# Altium PCB NyaBall.PcbDoc
Units mil, origin at the board's own origin, x right, y up, seen from the top; angles counter-clockwise.
Board outline 984.22 x 984.22 mil, 4 copper layers (Top Layer, Mid 1, Mid 2, Bottom Layer), stack 63.233 mil thick; 58 components, 37 nets, 194 pads, 74 vias.
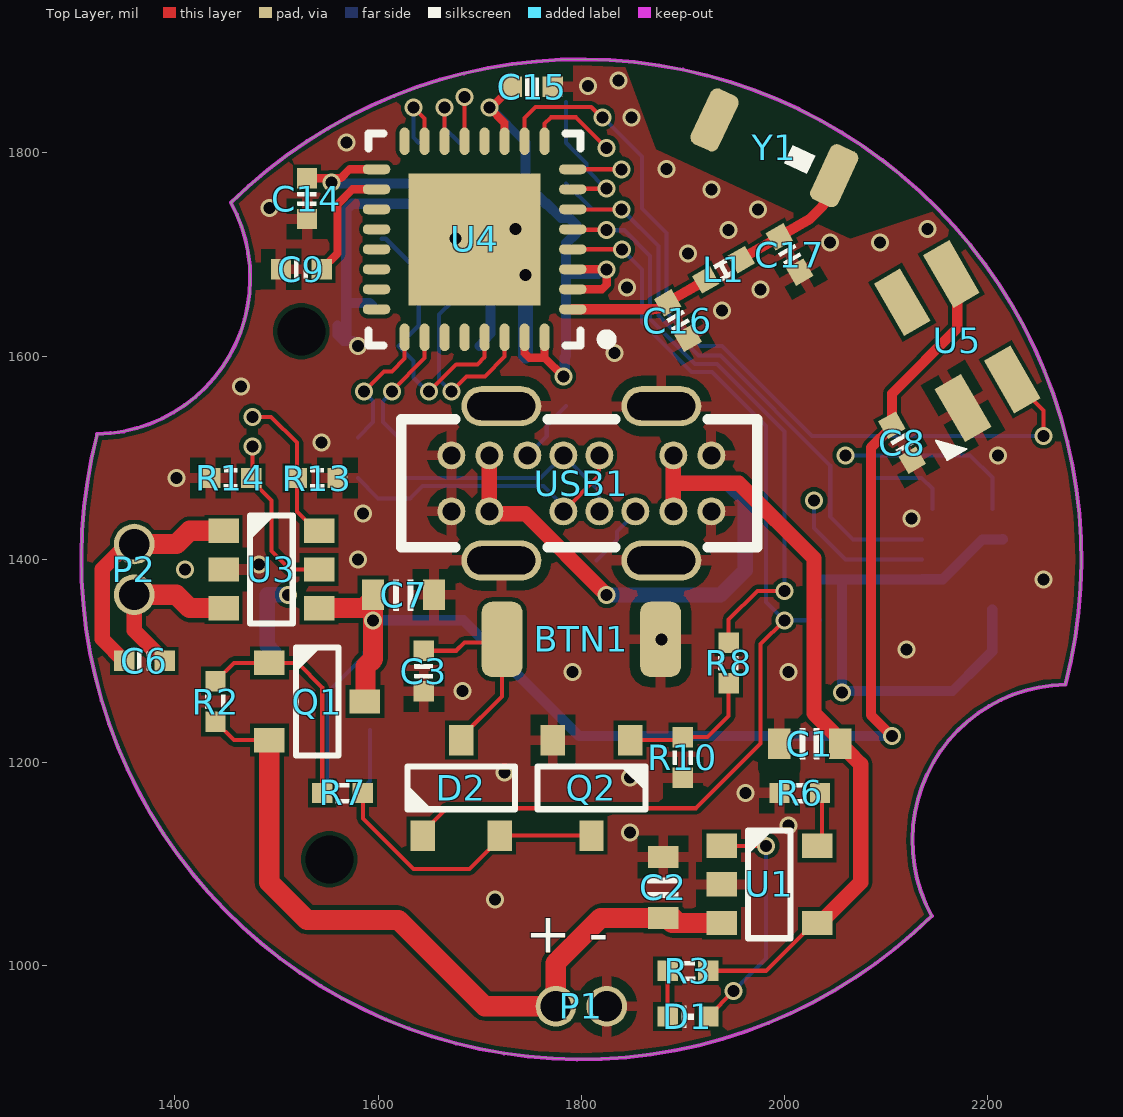
[diagram p0: Top Layer view]
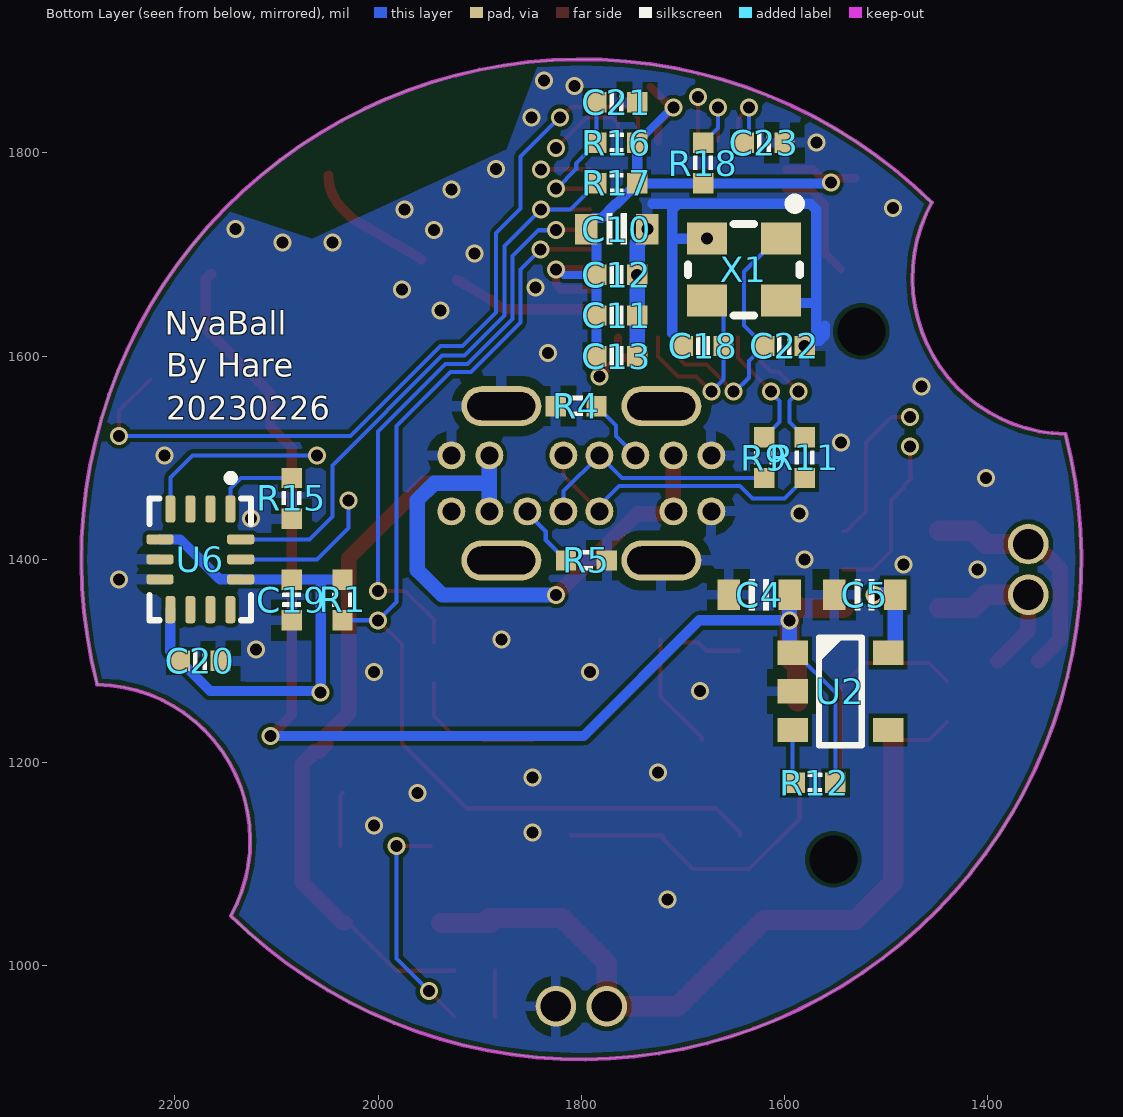
[diagram p1: Bottom Layer view, seen from below]
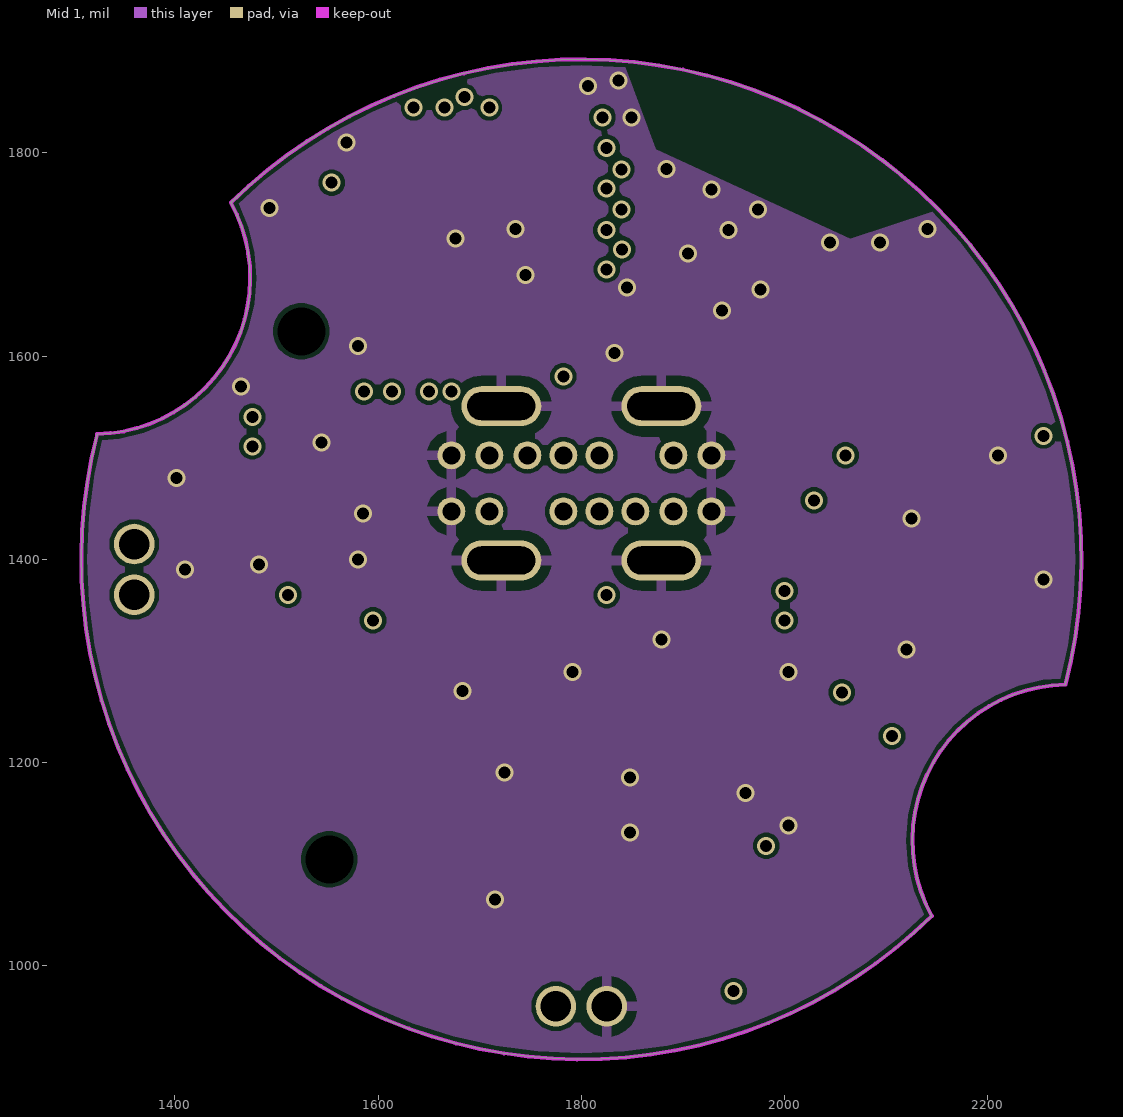
[diagram p2: Mid 1]
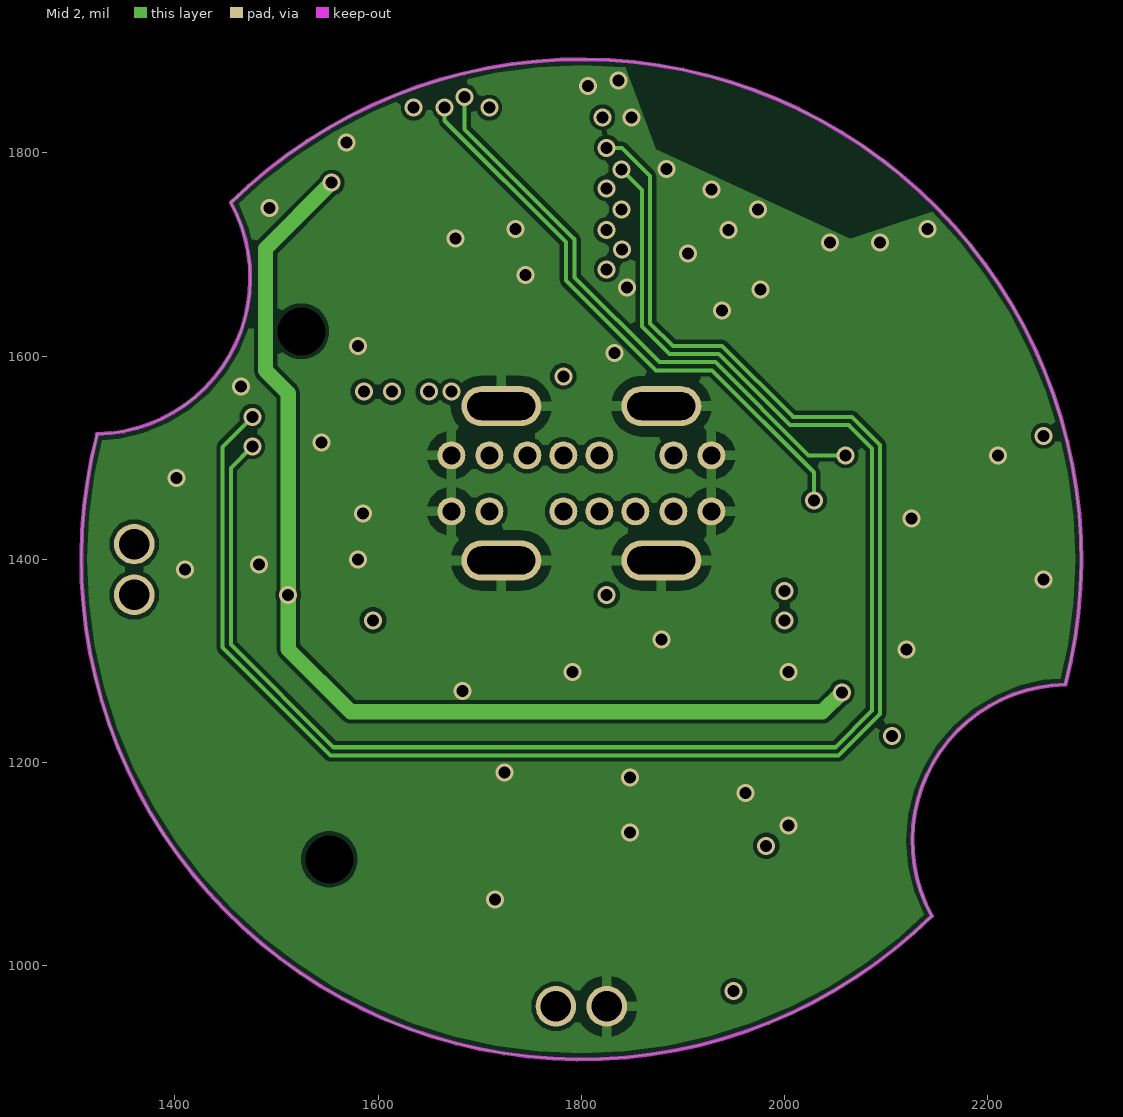
[diagram p3: Mid 2]
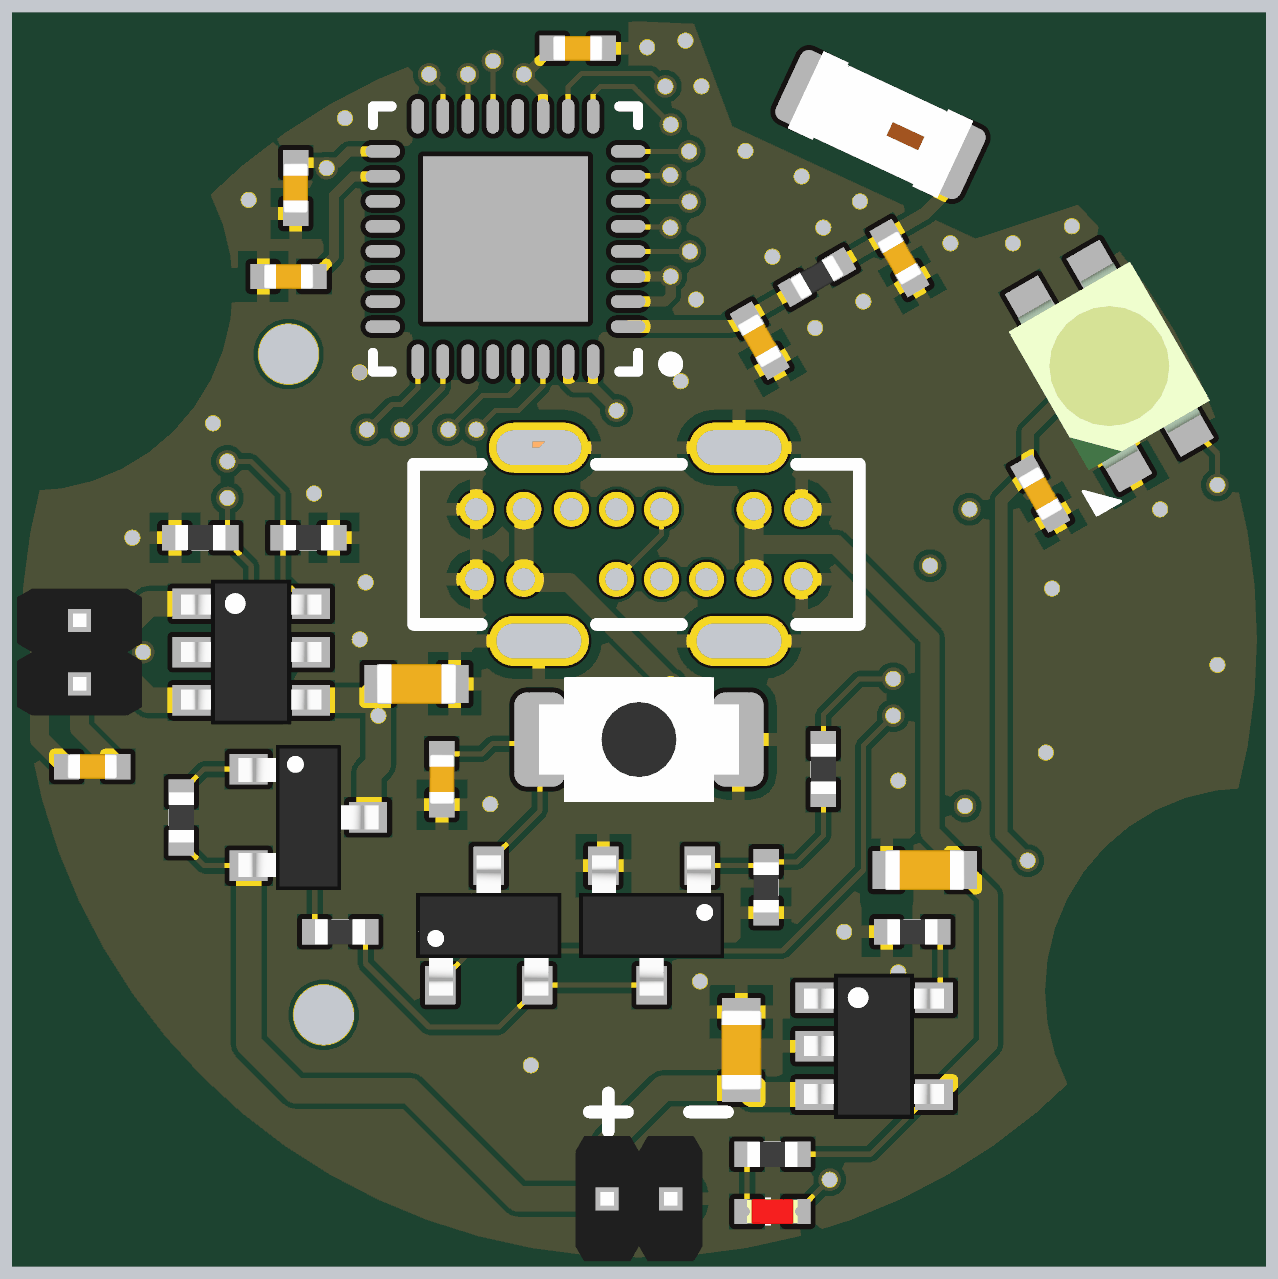
[diagram p4: 3D render of the assembled board from above, using the file's embedded part models]
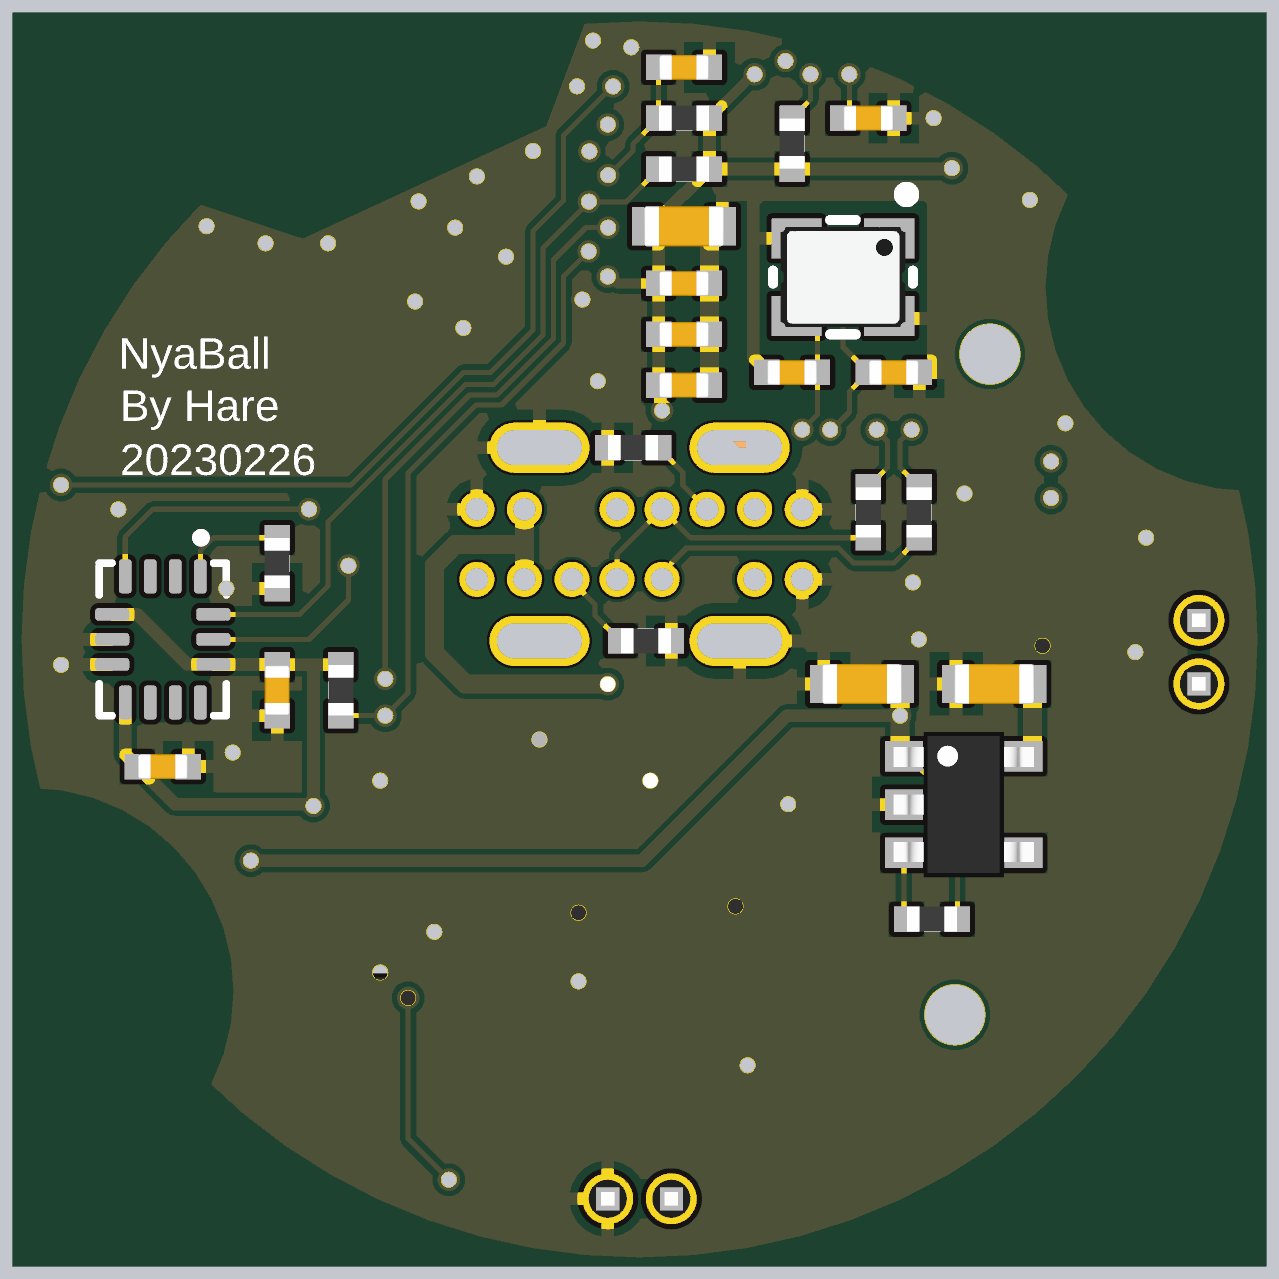
[diagram p5: 3D render of the assembled board from below, using the file's embedded part models]

## Layer stack, top to bottom
Top Solder: solder mask 0.4, Solder Resist, Dk 3.8
Top Layer: signal copper 1.4
Dielectric 2: prepreg 3.937, PP-006, Dk 4.05
Mid 1: signal copper 1.3779
Dielectric 1: prepreg 49.8031, PP-006, Dk 4.6
Mid 2: signal copper 1.3779
Dielectric 3: prepreg 3.937, PP-006, Dk 4.05
Bottom Layer: signal copper 1.4
Bottom Solder: solder mask 0.4, Solder Resist, Dk 3.8

## Board outline
1323.56,1523.26 ccw(c1800,1400) 2144.96,1049.02 cw(c2279.38,1123.23) 2276.44,1276.74 ccw(c1800,1400) 1455.04,1750.98 cw(c1320.62,1676.77)

## Design rules (kind name [scope] priority, off if disabled: settings)
Clearance [All] p1: gap=4 ignorepadtopadclearanceinfootprint=TRUE
ComponentClearance [All] p1: gap=0 collisioncheckmode=3 verticalgap=0 showdistances=FALSE
DiffPairsRouting [All] p1: maxlimit=10 minlimit=10 mostfreqgap=10 toplayer_minwidth=7.87 toplayer_maxwidth=15 toplayer_prefwidth=7.87 midlayer1_minwidth=7.87 midlayer1_maxwidth=15 midlayer1_prefwidth=7.87 midlayer2_minwidth=7.87 midlayer2_maxwidth=15 midlayer2_prefwidth=7.87 bottomlayer_minwidth=7.87 bottomlayer_maxwidth=15 bottomlayer_prefwidth=7.87 maxuncoupledlength=500
Height [All] p1 off: minheight=0 maxheight=0 prefheight=0
MatchedLengths SD_CARD_MatchedLengths [InNetClass('SD_CARD')] p1: tolerance=400 checknetsindiffpair=FALSE checkdiffpairvsdiffpair=TRUE checkxsignals=TRUE checkothers=TRUE
PolygonConnect PolygonConnect_Via [IsVia] p1: connectstyle=Direct reliefconductorwidth=10 reliefentries=4 polygonreliefangle="90 Angle" airgapwidth=10
PolygonConnect PolygonConnect_GND [InNet('GND')] p2: connectstyle=Relief reliefconductorwidth=10 reliefentries=4 polygonreliefangle="90 Angle" airgapwidth=10
PolygonConnect [All] p3: connectstyle=Direct reliefconductorwidth=10 reliefentries=4 polygonreliefangle="90 Angle" airgapwidth=10
RoutingVias [All] p1: holewidth=28 width=50 viastyle="Through Hole" minholewidth=7.87 minwidth=15.75 maxholewidth=28 maxwidth=50
SolderMaskExpansion [All] p1: expansion=4 istentingtop=FALSE
Width Width_PWR [InNetClass('PWR')] p1: maxlimit=23.62 minlimit=7.87 preferedwidth=10
Width [All] p2: maxlimit=78.74 minlimit=4 preferedwidth=10
27 further rules are at their usual default settings.

## Components (designator, comment, footprint, x,y, rotation, side; value= is the part's Value field where it differs from the comment)
BTN1 "PWR Button" BTN_2S 1800,1321.26 r180 top locked
C1 "10uF" CAP_0603 2024.81,1218.5 r0 top
C2 "10uF" CAP_0603 1880.5,1077 r270 top
C3 "100nF" CAP_0402 1645,1290 r270 top
C4 "10uF" CAP_0603 1625,1365 r180 bottom
C5 "10uF" CAP_0603 1521,1365 r180 bottom
C6 "100nF" CAP_0402 1370,1300 r0 top
C7 "10uF" CAP_0603 1625,1365 r180 top
C8 "1uF" CAP_0402 2115.75,1514.75 r120 top
C9 "1uF" CAP_0402 1524.41,1685.47 r0 top
C10 "10uF" CAP_0603 1765,1725 r0 bottom
C11 "1uF" CAP_0402 1765,1640 r0 bottom
C12 "1uF" CAP_0402 1765,1680 r0 bottom
C13 "100nF" CAP_0402 1765,1600 r0 bottom
C14 "100nF" CAP_0402 1530,1755 r90 top
C15 "100nF" CAP_0402 1751.85,1865 r180 top
C16 "NC" CAP_0402 1895,1635 r120 top
C17 "NC" CAP_0402 2005,1700 r120 top
C18 "18pF" CAP_0402 1680,1610 r180 bottom
C19 "100nF" CAP_0402 2085,1360 r90 bottom
C20 "100nF" CAP_0402 2175,1300 r0 bottom
C21 "1uF" CAP_0402 1765,1850 r0 bottom
C22 "18pF" CAP_0402 1600,1610 r0 bottom
C23 "NC" CAP_0402 1620,1810 r180 bottom
D1 "RED" LED_0402 1905,950 r180 top
D2 "BAT54" SOT-23-3 1681.85,1175 r270 top
L1 "0R" IND_0402 1940,1685 r30 top
P1 "DIP 1x2" HDR1X2_1.27_180 1775,960 r90 top
P2 "DIP 1x2" HDR1X2_1.27_180 1360,1365 r180 top
Q1 "SI2305" SOT-23-3 1540,1260 r180 top
Q2 "SS8050" SOT-23-3 1810,1175 r90 top
R1 "10K" RES_0402 2035,1360 r90 bottom
R2 "100K" RES_0402 1440,1260 r270 top
R3 "4.7K" RES_0402 1905,995 r0 top
R4 "5.1K" RES_0402 1805,1550.78 r180 bottom
R5 "5.1K" RES_0402 1795,1398.83 r0 bottom
R6 "18K" RES_0402 2015,1170 r180 top
R7 "100K" RES_0402 1565,1170 r180 top
R8 "1K" RES_0402 1945,1298 r270 top
R9 "22R" RES_0402 1620,1500 r90 bottom
R10 "10K" RES_0402 1900,1205 r90 top
R11 "22R" RES_0402 1580,1500 r90 bottom
R12 "10K" RES_0402 1570,1180 r0 bottom
R13 "10K" RES_0402 1540,1480 r0 top
R14 "10K" RES_0402 1455,1480 r180 top
R15 "10K" RES_0402 2085,1460 r270 bottom
R16 "10K" RES_0402 1765,1810 r0 bottom
R17 "4.7K" RES_0402 1765,1770 r180 bottom
R18 "4.7K" RES_0402 1680,1790 r270 bottom
U1 "TP4065" SOT-23-5 1985,1080 r180 top
U2 "RT9193-33GB" SOT-23-5 1545,1270 r0 bottom
U3 "MX113H" SOT-23-6 1495,1390 r180 top
U4 "ESP32-C3FN4" QFN-32-5x5-P0.5 1695,1715 r90 top locked
U5 "TC3528RGB" LED_3528_RGB 2170,1615 r120 top locked
U6 "BMI160" LGA-14-2.5X3.0-P0.5 2175,1400 r0 bottom
USB1 "Type-C" USB-C-TH_TYPE-C-USB-14P 1800,1474.8 r180 top locked
X1 "X252040MMB4SI" XTAL_2520-4 1640,1685 r0 bottom
Y1 "2450AT18B100" ANT_2.4G_3.2x1.6 1990,1805 r155 top

## Footprints (in the part's own frame and the unit in brackets; to place one, negate y for a bottom-side part, rotate by r counter-clockwise, add the part's x,y. Pads: shape width x height; smd on the part's side, far side on the other; paste and mask are expansions set on the pad)
ANT_2.4G_3.2x1.6 [mil]
  rrect50% 30x60 smd: 1(-65,0) 2(65,0)
  silkscreen extent -40,-10 -15,10, body extent -65,-33 65,33, height 53
BTN_2S [mil]
  rrect50% 40x74 smd: 1(-78,0) 2(78,0)
  body extent -79,-49 79,49, height 63
CAP_0402 [mil]
  rect 20x20 smd: 1(-20,0) 2(20,0)
  silkscreen extent -7,-9 7,9, body extent -20,-10 20,10, height 20
CAP_0603 [mil]
  rect 22x30 smd: 1(-30,0) 2(30,0)
  silkscreen extent -10,-15 10,15, body extent -31,-16 31,16, height 31
HDR1X2_1.27_180 [mil]
  round 40 hole 30: 1(0,0) 2(0,-50)
  body extent -49,-75 49,25, height 210
IND_0402 [mil]
  rect 20x20 smd: 1(-20,0) 2(20,0)
  silkscreen extent -7,-9 7,9, body extent -20,-10 20,10, height 20
LED_0402 [mil]
  rect 20x20 smd: 1(20,0) 2(-20,0)
  silkscreen extent -6,-10 6,10, body extent -20,-10 20,10, height 18
LED_3528_RGB [mil]
  rect 60x30 smd: 1(-60,28) 2(-60,-28) 3(60,-28) 4(60,28)
  silkscreen extent -97,45 -75,67, body extent -69,-55 69,55, height 75
LGA-14-2.5X3.0-P0.5 [mil]
  rrect50% 9.84x26.78 smd: 1(-29.53,-49.61) 3(9.84,-49.61) 9(9.84,49.61) 11(-29.53,49.61)
  rrect50% 9.85x26.78 smd: 2(-9.84,-49.61) 4(29.53,-49.61) 8(29.53,49.61) 10(-9.84,49.61)
  rrect50% 26.78x9.84 smd: 5(39.76,-19.68) 6(39.76,0) 13(-39.76,0) 14(-39.76,-19.68)
  rrect50% 26.78x9.85 smd: 7(39.76,19.69) 12(-39.76,19.69)
  silkscreen extent -50,-82 50,60, body extent -49,-59 49,59, height 33
QFN-32-5x5-P0.5 [mm] "QFN, 32-Leads, Body 4.95x4.95mm, Pitch 0.50mm, Thermal Pad 3.30x3.30mm, IPC Medium Density"
  oval 0.25x0.69 smd: 1(-1.75,-2.452) 2(-1.25,-2.452) 3(-0.75,-2.452) 4(-0.25,-2.452) 5(0.25,-2.452) 6(0.75,-2.452) 7(1.25,-2.452) 8(1.75,-2.452) 17(1.75,2.452) 18(1.25,2.452) 19(0.75,2.452) 20(0.25,2.452) 21(-0.25,2.452) 22(-0.75,2.452) 23(-1.25,2.452) 24(-1.75,2.452)
  oval 0.69x0.25 smd: 9(2.452,-1.75) 10(2.452,-1.25) 11(2.452,-0.75) 12(2.452,-0.25) 13(2.452,0.25) 14(2.452,0.75) 15(2.452,1.25) 16(2.452,1.75) 25(-2.452,1.75) 26(-2.452,1.25) 27(-2.452,0.75) 28(-2.452,0.25) 29(-2.452,-0.25) 30(-2.452,-0.75) 31(-2.452,-1.25) 32(-2.452,-1.75)
  rect 3.3x3.3 smd: 33(0,0)
  silkscreen extent -2.65,-3.43 2.65,2.65, body extent -2.5,-2.5 2.5,2.5, height 0.85
RES_0402 [mil]
  rect 20x20 smd: 1(-20,0) 2(20,0)
  silkscreen extent -7,-10 7,10, body extent -20,-10 20,10, height 14
SOT-23-3 [mil]
  rect 30x24 smd: 1(47,-38) 2(47,38) 3(-47,0)
  silkscreen extent -21,-53 21,53, body extent -55,-57 55,57, height 51
SOT-23-5 [mil]
  rect 30x24 smd: 1(47,-38) 2(47,0) 3(47,38) 4(-47,38) 5(-47,-38)
  silkscreen extent -21,-53 21,53, body extent -55,-57 55,57, height 57
SOT-23-6 [mil]
  rect 30x24 smd: 1(47,-38) 2(47,0) 3(47,38) 4(-47,38) 5(-47,0) 6(-47,-38)
  silkscreen extent -21,-53 21,53, body extent -55,-57 55,57, height 57
USB-C-TH_TYPE-C-USB-14P [mm]
  oval 2x1 hole 0.7 slot 1.7 at 0 deg mask+0.051: 0(-2,1.93) 0(-2,-1.93) 0(2,1.93) 0(2,-1.93)
  round 0.7 hole 0.45 mask+0.051: 1(-3.25,-0.7) 2(-2.3,-0.7) 3(-0.45,-0.7) 4(0.45,-0.7) 5(1.35,-0.7) 6(2.3,-0.7) 7(3.25,-0.7) 8(3.25,0.7) 9(2.3,0.7) 10(0.45,0.7) 11(-0.45,0.7) 12(-1.35,0.7) 13(-2.3,0.7) 14(-3.25,0.7)
  silkscreen extent -4.4,-1.6 4.5,1.6
XTAL_2520-4 [mm]
  rect 1x0.8 smd: 1(-0.925,-0.775) 2(0.925,-0.775) 3(0.925,0.775) 4(-0.925,0.775)
  silkscreen extent -1.4,-1.78 1.4,1.14, body extent -1.25,-1 1.25,1, height 0.79

## Part data
BTN1: library part Button, "Button"
C1 C2 C3 C4 C5 C6 C7 C8 C9 C10 C11 C12 C13 C14 C15 C16 C17 C18 C19 C20 C21 C22 C23: library part CAP, "Capacitor"
  C1 C2 C4 C5 C7 C8 C9 C10 C11 C12 C21: Specification="X5R 10V"
  C3 C6 C13 C14 C15 C16 C17 C19 C20 C23: Specification="X7R 50V"
  C18 C22: Specification="COG 50V"
D1: library part LED, "LED"
D2: library part Diode-2
L1: library part IND, "Inductor", Specification=2.2A
P1 P2: library part HDR1x2, "Header", Type=1.27
Q1: library part MOS-P, "P-Channel MOSFET", Specification="-12V -2.8A"
Q2: library part BJT_NPN, "Transistor", Specification="40V 1.5A"
R1 R2 R3 R4 R5 R6 R7 R8 R9 R10 R11 R12 R13 R14 R15 R16 R17 R18: library part RES, "Resistor", Specification=±1%
U1: "TP4065线性锂离子电池充电器"
U2: library part RT9193, "LDO"
U3: "电机驱动 VCC=6.5V 条件下最大持续输出电流达到 1A，最大峰值输出电流达到 1.5A；工作电压2V 到 8V"
U4: library part ESP32-C3
U6: "low power IMU"
USB1: library part USB-Type-C-14P
X1: library part XTAL-4P, Specification=40M-10pF
Y1: library part ANTENNA

## Free pads (board coordinates)
  round 0 hole 47.24: 0(1524.41,1624.41) 0(1551.97,1104.72)

## Via types
v1: diameter 17.72, hole 11.81, Top Layer to Bottom Layer, tented both sides, 74 vias

## Nets (pads, with @x,y where several pads share a name; then routed paths per layer and width w, separated by ;. In a path a pad name is that pad's centre, name@x,y a point inside that pad or via, vN(x,y) a via of type N, cw(c..) or ccw(c..) an arc to the next point about the centre after c; other vN are vias at no path point)
ESP_IO2: R17.1 U4.6 U6.14 | length 613.4
  Top Layer w4: U4.6 1791.71,1744.33 v1(1839.81,1744.33)
  Bottom Layer w4: R17.1 1810.86,1744.14 1839.61,1744.14 v1(1839.81,1744.33) 1875.8,1708.35 1875.8,1639.79 1915.18,1600.41 1936.9,1600.41 2045,1492.31 2045,1442.2 2067.52,1419.68 U6.14
ESP_IO8: R18.1 U4.14 U6.13 | length 789
  Top Layer w4: U4.14 v1(1665.47,1844.51)
  Mid 2 w4: v1(1665.47,1844.51) 1665.47,1831.64 1785,1712.11 1785,1674.47 1873.47,1586 1928.68,1586 2029,1485.68 v1(2029,1458)
  Bottom Layer w4: v1(1665.47,1844.51) 1665.47,1824.53 R18.1 ; v1(2029,1458) 2029,1431 2060,1400 U6.13
ESP_IO9: C23.1 U4.15 | length 74
  Top Layer w4: v1(1635,1844.51) 1645.79,1833.72 U4.15
  Bottom Layer w4: v1(1635,1844.51) 1635,1815 C23.1
ESP_RST: C21.2 R16.2 U4.7 | length 135.2
  Top Layer w4: U4.7 1792,1764.69 1824.21,1764.69 v1(1824.69,1765.16)
  Bottom Layer w4: C21.2 R16.2 1793,1802 1793,1801.75 1805,1789.75 1805,1784.21 1824.05,1765.16 v1(1824.69,1765.16)
ESP_USB_D_N: R11.2 U4.25 | length 129.5
  Top Layer w4: v1(1586,1565) 1605.8,1584.8 1613.48,1584.8 1626.1,1597.43 U4.25
  Bottom Layer w4: R11.2 1595,1535 1595,1556 v1(1586,1565)
ESP_USB_D_P: R9.2 U4.26 | length 121.6
  Top Layer w4: v1(1613.48,1565) 1613.48,1565.74 1645.79,1598.05 U4.26
  Bottom Layer w4: v1(1613.48,1565) 1613.48,1564.28 1605,1555.8 1605,1535 R9.2
ESP_XTAL_IN: C18.2 U4.30 X1.3 | length 188.6
  Top Layer w4: v1(1672.05,1565) 1687.04,1580 1705,1580 1724.53,1599.53 U4.30
  Bottom Layer w4: v1(1672.05,1565) 1660,1577.05 1660,1640.74 1673.75,1654.49 X1.3
ESP_XTAL_OUT: C22.2 U4.29 X1.1 | length 277.8
  Top Layer w4: v1(1650,1565) 1676.9,1591.9 1697.84,1591.9 1704.84,1598.9 U4.29
  Bottom Layer w4: X1.1 1607.52,1715.51 1640,1683.03 1640,1630 C22.2 1635,1595 1635,1578.7 1648.7,1565 v1(1650,1565)
GND: BTN1.1 C1.1 C2.1 C3.2 C4.1 C5.1 C7.1 C8.1 C9.1 C10.1 C11.1 C12.1 C13.1 C14.1 C15.1 C16.1 C17.1 C18.1 C19.1 C20.1 C21.1 C22.1 C23.2 P1.2 Q2.2 R4.1 R5.1 R6.2 R10.1 R13.2 R14.2 R15.2 U1.2 U2.2 U3.2 U4.33 U5.1 U6.6 U6.7 USB1.0 USB1.1 USB1.7 USB1.8 USB1.14 X1.2 X1.4 | length 658.9
  Bottom Layer w10: 1560,1630 1560,1620.86 1565.86,1615 1575.36,1615 v1(1580.36,1610) ; 1568.69,1621.31 1568.69,1652.42 ; X1.4@1595.13,1648.53 1591.24,1652.42 1568.69,1652.42 ; v1(1676.42,1715.51) 1709.98,1715.51 1710.49,1715 ; C18.1 1705,1615 1705,1616.73 1710.49,1622.22 1710.49,1715 ; 1730,1750 1704.63,1750 ; 1568.69,1652.42 1568.69,1744.14 1574.55,1750 1704.63,1750 ; 1704.63,1750 1710.49,1744.14 1710.49,1715
  Bottom Layer w15: v1(1735,1725) 1735,1721 1745,1711 C12.1 ; C13.1 C11.1 1745,1679.69 v1(1745.31,1680)
  other v1: 1715,1065 1848,1131 2003.96,1138 1961.43,1170 1848,1185 1724.53,1190 1683.05,1270.36 1791.52,1288.89 2003.96,1288.89 2120,1311 1878.74,1321.26 2255,1380 1410,1390 1483,1395 1580.36,1400 2125,1440 1585,1444.84 1401.5,1480 2210,1502.27 1544.41,1514.75 1465,1570 1832.86,1603.07 1938.62,1645 1976.5,1665.79 1844.94,1667.33 1905,1701.06 2045,1711.59 2094.18,1711.59 1945,1723.89 2140.57,1725 1973.81,1744.53 1493,1745.74 1927.95,1764.21 1883.8,1784.21 1568.69,1810 1849.16,1835.08 1806.5,1865.75 1836.58,1871.02
IMU_INT: U4.13 U6.4 | length 789.5
  Top Layer w4: U4.13 v1(1685.16,1855)
  Mid 2 w4: v1(1685.16,1855) 1685.16,1823.27 1793.43,1715 1793.43,1677.36 1876.79,1594 1932,1594 2023.63,1502.36 v1(2060,1502.36)
  Bottom Layer w4: v1(2060,1502.36) 2182.64,1502.36 2204.53,1480.47 U6.4
KEY_WKUP: D2.2 Q2.3 R7.1 | length 286.1
  Top Layer w4: R7.1 1585,1145 1635,1095 1689.84,1095 1709.84,1115 1719.85,1125 D2.2 Q2.3
MOTOR_IN1: R14.1 U3.5 U4.8 | length 1803.5
  Top Layer w4: v1(1476.27,1511.27) 1476.27,1481.27 R14.1 1483,1472 1483,1470 1495,1458 1495,1408.24 1513.24,1390 U3.5 ; U4.8 v1(1839.45,1783.9)
  Mid 2 w4: v1(1476.27,1511.27) 1455,1490 1455,1316.31 1556.31,1215 2050,1215 2086.18,1251.18 2086.18,1509.03 2063.2,1532 2005.31,1532 1935.31,1602 1886.76,1602 1859.8,1628.97 1859.8,1763.56 v1(1839.45,1783.9)
MOTOR_IN2: R13.1 U3.6 U4.9 | length 1932.2
  Top Layer w4: v1(1476.27,1540) 1494.75,1540 1520,1514.75 R13.1 1520,1447 1529,1438 1539,1428 U3.6 ; U4.9 1763.9,1828.9 1770.08,1835.08 1794.92,1835.08 v1(1825,1805)
  Mid 2 w4: v1(1476.27,1540) 1464.54,1528.28 1447,1510.73 1447,1313 1553,1207 2053.31,1207 2094.18,1247.86 2094.18,1512.34 2066.52,1540 2008.62,1540 1938.62,1610 1890.07,1610 1867.8,1632.28 1867.8,1777.15 1839.95,1805 v1(1825,1805)
NetBTN1_2: BTN1.2 C3.1 D2.3 | length 202.6
  Top Layer w4: C3.1 1676.9,1310 1684.9,1318 1706.5,1318 BTN1.2@1722,1302.5 ; D2.3 1681.85,1225 1722,1265.15 BTN1.2@1722,1302.5 ; BTN1.2 BTN1.2@1722,1302.5
NetC6_1: C6.1 P2.2 U3.1 | length 234.3
  Top Layer w15: C6.1 1328.5,1321.5 1328.5,1390.26 1353.24,1415 P2.2
  Top Layer w20: P2.2 1401.5,1415 1414.5,1428 U3.1
NetC6_2: C6.2 P2.1 U3.3 | length 165.8
  Top Layer w15: P2.1 1360,1330 1387.5,1302.5 C6.2
  Top Layer w20: P2.1@1365,1365 1401.5,1365 1414.5,1352 U3.3
NetC9_2: C9.2 U4.18 | length 114.9
  Top Layer w8: C9.2 1560,1701.06 1560,1749.29 1574.92,1764.21 U4.18
NetC16_2: C16.2 L1.1 U4.1 | length 139.2
  Top Layer w10: U4.1 1869.99,1646.1 ccw(c1869.99,1667.33) C16.2 1888.98,1655.44 1918.39,1672.42 L1.1
NetC17_2: C17.2 L1.2 Y1.1 | length 129.1
  Top Layer w10: L1.2 1961.43,1697.88 1990.7,1714.77 C17.2 1999.17,1720.09 2025,1735 2035.74,1745.74 ccw(c2003.96,1777.53) Y1.1
NetD1_1: D1.1 R3.1 | length 45
  Top Layer w4: D1.1 R3.1
NetD1_2: D1.2 U1.1 | length 225.6
  Top Layer w4: D1.2 v1(1950,975) ; U1.1@1948,1118 v1(1982,1118)
  Bottom Layer w4: v1(1950,975) 1982,1007 v1(1982,1118)
NetQ1_1: Q1.1 R2.1 R7.2 | length 226.4
  Top Layer w4: R2.1 1458,1298 Q1.1 1521,1298 1545,1274 R7.2
NetQ2_1: Q2.1 R8.2 R10.2 | length 139.1
  Top Layer w4: Q2.1 1897,1222 R10.2 1924.34,1225 1945,1245.66 R8.2
NetR4_2: R4.2 USB1.5 | length 64.2
  Bottom Layer w4: USB1.5 1766,1521.52 1766,1531.78 R4.2
NetR5_2: R5.2 USB1.12 | length 64.2
  Bottom Layer w4: R5.2 1835,1418.83 1835,1427.42 1853.15,1445.56 USB1.12
NetR6_1: R6.1 U1.5 | length 52.8
  Top Layer w4: R6.1 2037,1168 U1.5@2037,1118
NetR12_2: R12.2 U2.3 | length 52.8
  Bottom Layer w4: R12.2 1592,1182 U2.3
NetR15_1: R15.1 U6.1 | length 84.7
  Bottom Layer w4: R15.1 2135,1480 2145.47,1469.53 U6.1
PWR_BTN: D2.1 R1.1 U4.4 | length 1029.8
  Top Layer w4: D2.1 1643.85,1131 1667.85,1155 1913,1155 1976.5,1218.5 1976.5,1316.5 v1(2000,1340) ; U4.4 v1(1840,1705.16)
  Bottom Layer w4: v1(1840,1705.16) 1859.8,1685.36 1859.8,1633.16 1908.55,1584.41 1928.59,1584.41 1982,1531 1982,1358 v1(2000,1340) R1.1
PWR_KEEP: R8.1 U4.5 | length 573.5
  Top Layer w4: U4.5 1792,1724.37 1824.21,1724.37 v1(1824.69,1723.89) ; R8.1 1945,1340.67 1973.33,1369 v1(2000,1369)
  Bottom Layer w4: v1(1824.69,1723.89) 1842.28,1723.89 1867.8,1698.37 1867.8,1636.48 1911.86,1592.41 1933.59,1592.41 2000,1526 v1(2000,1369)
RGB_DIN: U4.10 U5.2 | length 816.1
  Top Layer w4: U4.10 1744.21,1834.29 1754.92,1845 1809.8,1845 1819.82,1834.98 v1(1820.79,1834.98) ; U5.2 2255,1546.29 v1(2255,1521.52)
  Bottom Layer w4: v1(1820.79,1834.98) 1821.38,1834.98 1859.8,1796.56 1859.8,1745.2 1883.8,1721.2 1883.8,1643.1 1916.9,1610 1938.62,1610 2027.11,1521.52 v1(2255,1521.52)
USB_D_N: R11.1 USB1.3 USB1.10 | length 283
  Top Layer w4: USB1.10 1817.63,1482.58 1817.63,1502.27 USB1.3
  Bottom Layer w4: R11.1 1600,1460 1631.62,1460 1643.62,1472 1763,1472 1775,1460
USB_D_P: R9.1 USB1.4 USB1.11 | length 241.3
  Bottom Layer w4: R9.1 1759.92,1480 USB1.4 1817.63,1467.02 1817.63,1447.33 USB1.11
VBAT_IN: C2.2 P1.1 Q1.2 R2.2 U1.3 | length 769.1
  Top Layer w4: R2.2 1458,1222 Q1.2
  Top Layer w20: Q1.2 1493,1082 1530,1045 1620,1045 1705,960 P1.1 1775,1002.72 1819.28,1047 C2.2@1890.5,1047 ; C2.2 1884.5,1047 1889.5,1042 U1.3
VBAT_OUT: C4.2 C7.2 C8.2 Q1.3 R12.1 U2.1 U3.4 U5.3 | length 1432.6
  Top Layer w10: v1(2105.75,1226) 2085,1246.75 2085,1509.81 2105.75,1530.56 C8.2 2105.75,1563.08 2170,1627.33 2170,1675.21 U5.3
  Top Layer w20: U3.4 1586,1352 C7.2@1595,1361 ; Q1.3 1587.63,1260.63 1587.63,1294.5 1595,1301.87 v1(1595,1340) C7.2@1595,1361 ; C7.2 C7.2@1595,1361
  Bottom Layer w4: R12.1 1550,1269 1589,1308 U2.1
  Bottom Layer w10: U2.1@1595,1308 U2.1@1595,1311 ; v1(1595,1340) 1683.89,1340 1797.89,1226 v1(2105.75,1226)
  Bottom Layer w15: U2.1 1595,1311 v1(1595,1340) C4.2
VBUS_5V: C1.2 R3.2 U1.4 USB1.2 USB1.6 USB1.9 USB1.13 | length 1307.1
  Top Layer w4: R3.2 1982,995 2029,1042 U1.4
  Top Layer w15: USB1.6 USB1.9 1711.85,1444.84 1744.96,1444.84 v1(1825,1364.8) ; USB1.13 1890.56,1474.8 ; USB1.2 1890.56,1474.8 ; U1.4 2035,1042 2075,1082 2075,1198.31 2062.31,1211 2058.31,1211 2051.31,1218 2051.31,1226 2029,1248.31 2029,1401 1955.2,1474.8 1890.56,1474.8
  Bottom Layer w15: v1(1825,1364.8) 1936.9,1364.8 1961.43,1389.34 1961.43,1458.24 1944.87,1474.8 1890.56,1474.8 ; USB1.2 1890.56,1474.8 ; USB1.13@1892.96,1449.65 USB1.13 1890.56,1474.8
VCC_3V3: C5.2 C10.2 C11.2 C12.2 C13.2 C14.2 C15.2 C19.2 C20.2 R1.2 R16.1 R17.2 R18.2 U2.5 U4.2 U4.3 U4.11 U4.17 U4.31 U4.32 U6.5 U6.8 U6.12 | length 2520.6
  Top Layer w8: C14.2 1554.14,1775 1554.32,1775.18 1563.32,1775.18 1572.04,1783.9 U4.17 ; U4.11 1724.53,1829.43 v1(1709.44,1844.51) 1711.35,1844.51 C15.2 ; U4.31 1744.21,1603.07 1748.9,1598.39 1763.9,1598.39 ; U4.32 1763.9,1598.39 ; v1(1782.28,1580) 1763.9,1598.39 ; U4.2 1820.31,1665.79 1825,1670.47 v1(1825,1685.47) U4.3
  Mid 2 w15: v1(1554.32,1770.68) 1489.29,1705.65 1489.29,1585.71 1511.5,1563.5 v1(1511.5,1365) 1511.5,1311.44 1572.94,1250 2037.48,1250 v1(2056.48,1269)
  Bottom Layer w8: v1(1709.44,1844.51) 1710.49,1844.51 R16.1 ; C12.2 1816.9,1680 1822.37,1685.47 v1(1825,1685.47)
  Bottom Layer w10: v1(1554.32,1770.68) 1555,1770 R18.2 R17.2 ; R16.1 R17.2 ; v1(1782.28,1580) 1783.64,1581.36 1783.64,1598.64 C13.2 C11.2 C12.2 1785,1711 1795,1721 1795,1729 1788,1736 1780,1736 1766,1750 1765,1750 R17.2 ; R1.2 2056.48,1380 ; U6.8 2204.53,1309.53 C20.2 2165.36,1270.36 2057.83,1270.36 v1(2056.48,1269) 2056.48,1380 ; U6.5 2214.68,1419.6 2194.96,1419.6 2155.74,1380.39 2135.31,1380.39 U6.12 2135.16,1380.23 2085.23,1380.23 C19.2 2056.48,1380
  Bottom Layer w15: U2.5 1491,1315 C5.2 v1(1511.5,1365)
pads on no net: U2.4 U4.12 U4.16 U4.19 U4.20 U4.21 U4.22 U4.23 U4.24 U4.27 U4.28 U5.4 U6.2 U6.3 U6.9 U6.10 U6.11 Y1.2

## Polygon pours and split planes (outlines as drawn)
GND on Mid 2 "GND_L03_P000" (solid, remove dead copper, pour order 0): 1240,1915 2340,1915 2340,880 1240,880
GND on Mid 1 "GND_L02_P001" (solid, remove dead copper, pour order 1): 1240,1915 2340,1915 2340,880 1240,880
GND on Bottom Layer "GND_L04_P003" (solid, remove dead copper, pour order 3): 1240,1915 2340,1915 2340,880 1240,880
GND on Top Layer "GND_L01_P002" (solid, remove dead copper, pour order 2): 1240,1915 2340,1915 2340,880 1240,880

## Keep-outs
Keep-Out Layer:
  the board outline again, w3.94

## Other copper
Bottom Layer:
  pour cut-out: 1580.31,1610 1699.18,1610 1710.49,1621.31 1710.49,1744.14 1704.63,1750 1574.55,1750 1568.69,1744.14 1568.69,1621.31
Multi-Layer:
  pour cut-out: 1873.44,1803.7 2064.83,1715.28 2202.1,1760.62 1822.97,1938.35

## Silkscreen, mask and mechanical layers (free items; w line width, h text height)
Top Overlay:
  text "+ -" at 1745,1012.75 h39.37
Bottom Overlay:
  text "NyaBall" at 2209.76,1613 h39.37
  text "By Hare" at 2208.62,1571.95 h39.37
  text "20230226" at 2208.62,1529.44 h39.37
Mechanical 1:
  the board outline again, w3.94
Mechanical 20:
  circle w0.5: c1800,1321.26 r33.46
  circle w0.5: c1551.97,1104.72 r23.62
  circle w0.5: c1524.41,1624.41 r23.62
  lines w0.5: 1323.56,1523.26 ccw(c1800,1400) 2144.96,1049.02 cw(c2279.38,1123.23) 2276.44,1276.74 ccw(c1800,1400) 1455.04,1750.98 cw(c1320.62,1676.77) 1323.56,1523.26 ; 1687.8,1411.81 cw(c1687.8,1474.8) 1687.8,1537.8 1912.2,1537.8 cw(c1912.2,1474.8) 1912.2,1411.81 1687.8,1411.81 ; 1721.26,1262.2 1878.74,1262.2 1878.74,1380.31 1721.26,1380.31 1721.26,1262.2 ; 2077.31,1639.66 2187.55,1703.31 2256.45,1583.97 2146.21,1520.33 2077.31,1639.66
  lines w5.98: 1800,1400 2325,1400